# Altium PCB AudioLab.PcbDoc
Units mm, origin at the board's own origin, x right, y up, seen from the top; angles counter-clockwise.
Board outline 70 x 133.34 mm, 2 copper layers (Top Layer, Bottom Layer); 125 components, 71 nets, 537 pads, 7 vias.
Unrouted connection lines stored in the file: 231.
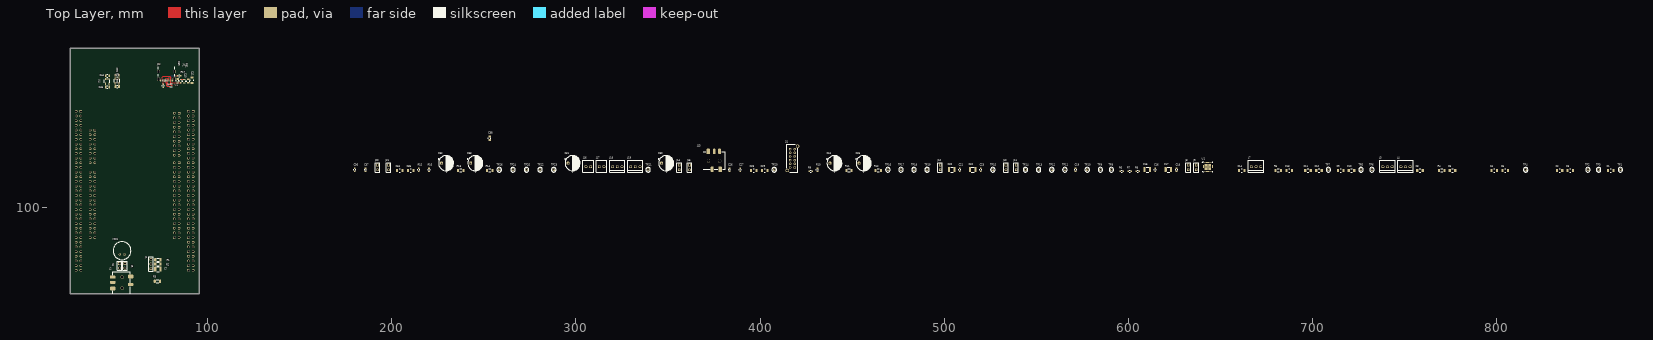
[diagram p0: Top Layer view]
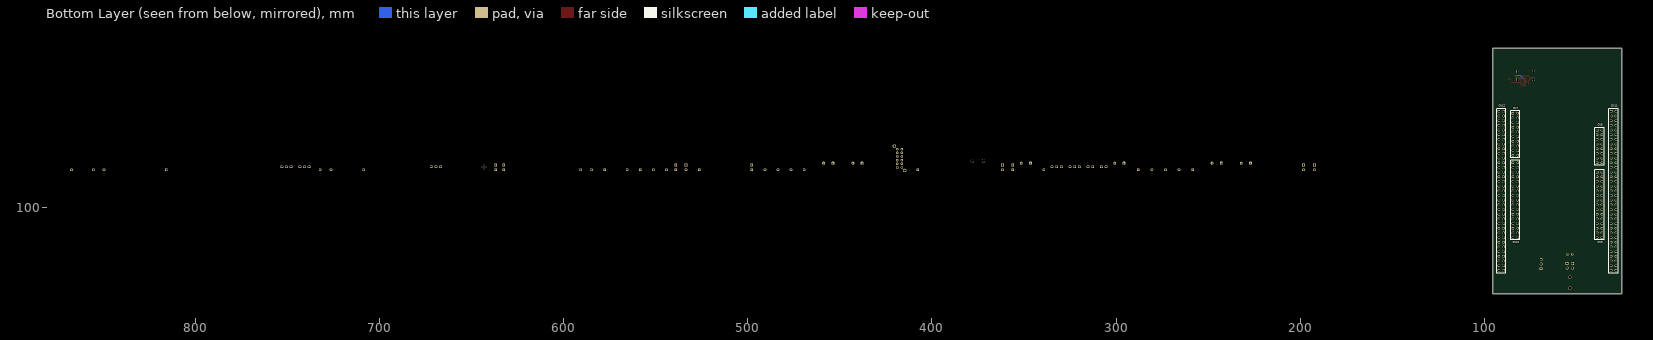
[diagram p1: Bottom Layer view, seen from below]

## Layer stack, top to bottom
Top Solder: solder mask 0.0102, Solder Resist, Dk 3.5
Top Layer: signal copper 0.0356
Dielectric 1: dielectric 0.32, FR-4, Dk 4.8
Bottom Layer: signal copper 0.0356
Bottom Solder: solder mask 0.0102, Solder Resist, Dk 3.5

## Board outline
25.3,53.45 95.3,53.45 95.3,186.79 25.3,186.79

## Design rules (kind name [scope] priority, off if disabled: settings)
AssemblyTestPointUsage [All] p1: isadvanced=TRUE
AssemblyTestpoint [All] p1: isadvanced=TRUE testpointundercomponent=TRUE minsize=1.016 maxsize=2.54 preferedsize=1.524 minholesize=0 maxholesize=1.016 preferedholesize=0.813 testpointgrid=0.025 usegrid=TRUE gridtolerance=0 allowsidetop=TRUE allowsidebottom=TRUE
Clearance [All] p1: isadvanced=TRUE gap=0.15 ignorepadtopadclearanceinfootprint=FALSE
Clearance [All] p2: gap=0.254 ignorepadtopadclearanceinfootprint=FALSE ismatrix=TRUE
ComponentClearance [All] p1: isadvanced=TRUE gap=0.254 collisioncheckmode=3 verticalgap=0.254 showdistances=FALSE
FabricationTestPointUsage [All] p1: isadvanced=TRUE valid=0 allowmultiple=FALSE
FabricationTestpoint [All] p1: isadvanced=TRUE side=3 testpointundercomponent=TRUE minsize=1.016 maxsize=2.54 preferedsize=1.524 minholesize=0 maxholesize=1.016 preferedholesize=0.813 testpointgrid=0.025 allowsidetop=TRUE allowsidebottom=TRUE usegrid=TRUE gridtolerance=0
FanoutControl Fanout_BGA [IsBGA] p1: isadvanced=TRUE bgadir=Out bgaviamode=Centered fanoutstyle=Auto fanoutdirection=Alternating viagrid=0.025 // Fanout_BGA (Default Rule)
FanoutControl Fanout_LCC [IsLCC] p2: isadvanced=TRUE bgadir=Out bgaviamode=Centered fanoutstyle=Auto fanoutdirection=Alternating viagrid=0.025 // Fanout_LCC (Default Rule)
FanoutControl Fanout_SOIC [IsSOIC] p3: isadvanced=TRUE bgadir=Out bgaviamode=Centered fanoutstyle=Auto fanoutdirection=Alternating viagrid=0.025 // Fanout_SOIC (Default Rule)
FanoutControl Fanout_Small [(CompPinCount < 5)] p4: isadvanced=TRUE bgadir=Out bgaviamode=Centered fanoutstyle=Auto fanoutdirection=OutThenIn viagrid=0.025 // Fanout_Small (Default Rule)
FanoutControl Fanout_Default [All] p5: isadvanced=TRUE bgadir=Out bgaviamode=Centered fanoutstyle=Auto fanoutdirection=Alternating viagrid=0.025 // Fanout_Default (Default Rule)
Height [All] p1: isadvanced=TRUE minheight=0 maxheight=25.4 prefheight=12.7
HoleSize [All] p1: isadvanced=TRUE absolutevalues=TRUE maxlimit=2.54 minlimit=0.025 maxpercent=80.000 minpercent=20.000
HoleToHoleClearance [All] p1: isadvanced=TRUE gap=0.254 allowstackedmicrovias=TRUE
LayerPairs [All] p1: isadvanced=TRUE enforce=TRUE
MinimumSolderMaskSliver [All] p1: isadvanced=TRUE minsoldermaskwidth=0.254
NetAntennae [All] p1: isadvanced=TRUE netantennaetolerance=0
PasteMaskExpansion [All] p1: isadvanced=TRUE expansion=0
PlaneClearance [All] p1: isadvanced=TRUE clearance=0.508
PlaneConnect [All] p1: isadvanced=TRUE planeconnectstyle=Relief reliefexpansion=0.508 reliefentries=4 reliefconductorwidth=0.254 reliefairgap=0.254
PolygonConnect [All] p1: connectstyle=Relief reliefconductorwidth=0.254 reliefentries=4 polygonreliefangle="90 Angle" airgapwidth=0.254
RoutingCorners [All] p1: isadvanced=TRUE cornerstyle=45-Degree minsetback=2.54 maxsetback=2.54
RoutingPriority [All] p1: isadvanced=TRUE routingpriority=0
RoutingVias [All] p1: holewidth=0.711 width=1.27 viastyle="Through Hole" minholewidth=0.711 minwidth=1.27 maxholewidth=0.711 maxwidth=1.27
ShortCircuit [All] p1: isadvanced=TRUE allowed=FALSE
SilkToSilkClearance [All] p1: isadvanced=TRUE silktosilkclearance=0.254
SilkToSolderMaskClearance [IsPad] p1: isadvanced=TRUE minsilkscreentomaskgap=0.254 clearancetoexposedcopper=TRUE
SolderMaskExpansion SolderMaskViasTented [IsVia] p1: isadvanced=TRUE expansion=0 istentingtop=TRUE useseparateexpansions=TRUE expansionbottom=0 istentingbottom=TRUE
SolderMaskExpansion SolderMaskPadsExpansion [IsPad] p2: isadvanced=TRUE expansion=0 istentingtop=FALSE
SolderMaskExpansion [All] p3: isadvanced=TRUE expansion=0 istentingtop=FALSE
SupplyNets "Schematic Supply Nets_9" [InNet('3V3')] p1: isadvanced=TRUE voltage=0.000
SupplyNets "Schematic Supply Nets_8" [InNet('DGND')] p2: isadvanced=TRUE voltage=0.000
SupplyNets "Schematic Supply Nets_7" [InNet('5V')] p3: isadvanced=TRUE voltage=0.000
SupplyNets "Schematic Supply Nets_6" [InNet('DRVDD')] p4: isadvanced=TRUE voltage=0.000
SupplyNets "Schematic Supply Nets_5" [InNet('DVDD')] p5: isadvanced=TRUE voltage=0.000
SupplyNets "Schematic Supply Nets_4" [InNet('VBUS')] p6: isadvanced=TRUE voltage=0.000
SupplyNets "Schematic Supply Nets_3" [InNet('IOVDD')] p7: isadvanced=TRUE voltage=0.000
SupplyNets "Schematic Supply Nets_2" [InNet('1V8')] p8: isadvanced=TRUE voltage=0.000
SupplyNets "Schematic Supply Nets_1" [InNet('GND')] p9: isadvanced=TRUE voltage=0.000
SupplyNets "Schematic Supply Nets" [InNet('AVDD')] p10: isadvanced=TRUE voltage=0.000
UnRoutedNet [All] p1: isadvanced=TRUE
UnpouredPolygon [All] p1: isadvanced=TRUE
Width [All] p1: isadvanced=TRUE maxlimit=1 minlimit=0.15 preferedwidth=0.254 minimp=50.000000 maximp=50.000000 favimp=50.000000
Width [All] p2: maxlimit=0.254 minlimit=0.254 preferedwidth=0.254
4 further rules are at their usual default settings.

## Classes and differential pairs
component class PS: C38 C39 C40 C41 C42 C43 C44 C45 F1 FB1 J22 R17 R18 t U2 U3 U4
component class CODEC: C1 C2 C3 C4 C5 C6 C7 C8 C9 C10 C11 C12 C13 C14 C15 C16 C17 C18 C19 C20 C21 C22 C23 C24 C25 C26 C27 C28 C29 C30 C31 C32 C33 C34 C35 C36 C37 J1 J2 J3 J4 J5 J6 J7 J8 J9 J10 J11 J12 J13 J14 J15 J16 J17 J18 J19 J20 J21 MIC1 R1 R2 R3 R4 R5 R6 R7 R8 R9 R10 R11 R12 R13 R14 R15 R16 S1 TP1 TP2 TP3 TP4 TP5 TP6 TP7 TP8 TP9 TP10 TP11 TP12 TP13 TP14 TP15 TP16 TP17 TP18 TP19 TP20 TP21 TP22 TP23 TP24 TP25 TP26 U1
component class AudioLab: CN7 CN8 CN9 CN10 CN11 CN12

## Components (designator, comment, footprint, x,y, rotation, side; value= is the part's Value field where it differs from the comment)
C1 "DNP_1206" CAPC3216 862.076,120.396 r0 top value=DNP
C2 "C3216X7R2A104K160AA" CAPC3216 834.263,120.396 r0 top value=0.1µF
C3 "C3216X7R2A104K160AA" CAPC3216 840.105,120.396 r0 top value=0.1µF
C4 "DNP_1206" CAPC3216 798.83,120.396 r0 top value=DNP
C5 "DNP_1206" CAPC3216 804.799,120.396 r0 top value=DNP
C6 "C3216X7R2A104K160AA" CAPC3216 776.097,120.396 r0 top value=0.1µF
C7 "C3225X7R1H106K250AC" CAPC3225 72.95,66.8 r180 top value=10µF
C8 "DNP_1206" CAPC3216 758.444,120.396 r0 top value=DNP
C9 "C3216X7R2A104K160AA" CAPC3216 715.391,120.396 r0 top value=0.1µF
C10 "C3216X7R2A104K160AA" CAPC3216 721.233,120.396 r0 top value=0.1µF
C11 "DNP_1206" CAPC3216 697.611,120.396 r0 top value=DNP
C12 "DNP_1206" CAPC3216 703.58,120.396 r0 top value=DNP
C13 "C3216X7R2A104K160AA" CAPC3216 687.451,120.396 r0 top value=0.1µF
C14 "DNP_1206" CAPC3216 661.543,120.396 r0 top value=DNP
C15 "C3225X7R1H106K250AC" CAPC3225 610.362,120.904 r0 top value=10µF
C16 "C0603G104K5RACT500" CAPC1608 614.68,120.777 r90 top value=0.1µF
C17 "C3225X7R1H106K250AC" CAPC3225 621.792,120.904 r0 top value=10µF
C18 "C0603G104K5RACT500" CAPC1608 626.237,120.777 r90 top value=0.1µF
C19 "C0603G104K5RACT500" CAPC1608 571.373,120.777 r90 top value=0.1µF
C20 "C3225X7R1H106K250AC" CAPC3225 504.19,120.904 r0 top value=10µF
C21 "C0603G104K5RACT500" CAPC1608 508.508,120.777 r90 top value=0.1µF
C22 "C3225X7R1H106K250AC" CAPC3225 515.493,120.904 r0 top value=10µF
C23 "C0603G104K5RACT500" CAPC1608 519.811,120.777 r90 top value=0.1µF
C24 "EEU-FR1E221B" CAPPRD500W60D800H1150 440.436,124.333 r0 top value=220µF
C25 "EEU-FR1E221B" CAPPRD500W60D800H1150 456.311,124.333 r0 top value=220µF
C26 "C1608X7R1H473K080AE" CAPC1608 383.413,120.777 r90 top value=47nF
C27 "C1608X7R1H473K080AE" CAPC1608 389.255,120.777 r90 top value=47nF
C28 "DNP_1206" CAPC3216 396.621,120.396 r0 top value=DNP
C29 "DNP_1206" CAPC3216 402.59,120.396 r0 top value=DNP
C30 "EEU-FR1E221B" CAPPRD500W60D800H1150 348.996,124.333 r0 top value=220µF
C31 "EEU-FR1E221B" CAPPRD500W60D800H1150 298.196,124.333 r0 top value=220µF
C32 "EEU-FR1E221B" CAPPRD500W60D800H1150 229.489,124.333 r0 top value=220µF
C33 "EEU-FR1E221B" CAPPRD500W60D800H1150 245.364,124.333 r0 top value=220µF
C34 "DNP_1206" CAPC3216 204.343,120.396 r0 top value=DNP
C35 "DNP_1206" CAPC3216 210.312,120.396 r0 top value=DNP
C36 "C1608X7R1H473K080AE" CAPC1608 179.832,120.777 r90 top value=47nF
C37 "C1608X7R1H473K080AE" CAPC1608 185.674,120.777 r90 top value=47nF
C38 "CC0805KRX7R9BB104" CAPC2012 253.111,137.922 r90 top value=100nF
C39 "CC0805KRX7R9BB104" CAPC2012 83.642,169.095 r270 top value=100nF
C40 "CL21B105KBFNNNE" CAPC2012 89.375,168.945 r90 top value=1µF
C41 "C3216X5R1C106K160AA" CAPC3216 91.5,169.47 r90 top value=10µF
C42 "CL21B105KBFNNNE" CAPC2012 50.93,172.105 r180 top value=1µF
C43 "CL21B105KBFNNNE" CAPC2012 50.935,165.95 r180 top value=1µF
C44 "CL21B105KBFNNNE" CAPC2012 45.517,171.875 r180 top value=1µF
C45 "CL21B105KBFNNNE" CAPC2012 45.517,165.72 r180 top value=1µF
CN7 "TSW-110-07-G-D" SAMTEC_TSW-110-07-G-D 83.136,140.064 r270 bottom locked
CN8 "TSW-108-07-G-D" SAMTEC_TSW-108-07-G-D 37.416,133.46 r270 bottom locked
CN9 "TSW-115-07-G-D" SAMTEC_TSW-115-07-G-D 37.416,101.71 r270 bottom locked
CN10 "TSW-117-07-G-D-LL" SAMTEC_TSW-117-07-G-D-LL 83.136,104.25 r270 bottom locked
CN11 "SSW-135-01-F-D" SAMTEC_SSW-135-01-F-D 29.903,109.33 r270 bottom locked
CN12 "SSW-135-01-F-D" SAMTEC_SSW-135-01-F-D 90.863,109.33 r270 bottom locked
F1 "0467002.NR" FUSC1608X31N 85.342,168.97 r270 top
FB1 "BLM21PG221SN1D" FP-BLM21-0_2-t0_85-e0_5-MFG 87.243,168.895 r270 top
J1 "M20-9990346" HARWIN_M20-9990346 69.1,69.575 r90 top
J2 "SJ1-3515-SMT-TR" SAMESKY_SJ1-3515-SMT 53.475,59.5 r90 top
J3 "397730003" MOLEX_0397730003 738.251,122.428 r0 top
J4 "397730003" MOLEX_0397730003 748.03,122.428 r0 top
J5 "HTSW-102-07-G-S" SAMTEC_HTSW-102-XX-X-S 51.975,68.6 r90 top
J6 "HTSW-102-07-G-S" SAMTEC_HTSW-102-XX-X-S 54.975,68.6 r90 top
J7 "397730003" MOLEX_0397730003 666.877,122.428 r0 top
J8 "HTSW-102-07-G-S" SAMTEC_HTSW-102-XX-X-S 632.587,122.047 r90 top
J9 "HTSW-102-07-G-S" SAMTEC_HTSW-102-XX-X-S 636.905,122.047 r90 top
J10 "HTSW-102-07-G-S" SAMTEC_HTSW-102-XX-X-S 533.527,122.047 r90 top
J11 "HTSW-102-07-G-S" SAMTEC_HTSW-102-XX-X-S 539.115,122.047 r90 top
J12 "HTSW-102-07-G-S" SAMTEC_HTSW-102-XX-X-S 497.84,122.047 r90 top
J13 "SJ1-3515-SMT-TR" SAMESKY_SJ1-3515-SMT 375.031,125.603 r0 top
J14 "HTSW-102-07-G-S" SAMTEC_HTSW-102-XX-X-S 356.108,122.047 r90 top
J15 "HTSW-102-07-G-S" SAMTEC_HTSW-102-XX-X-S 361.696,122.047 r90 top
J16 "0397730002" MOLEX_0397730002 305.435,122.428 r0 top
J17 "0397730002" MOLEX_0397730002 312.674,122.428 r0 top
J18 "397730003" MOLEX_0397730003 319.913,122.428 r0 top
J19 "397730003" MOLEX_0397730003 329.692,122.428 r0 top
J20 "HTSW-102-07-G-S" SAMTEC_HTSW-102-XX-X-S 192.278,122.047 r90 top
J21 "HTSW-102-07-G-S" SAMTEC_HTSW-102-XX-X-S 198.12,122.047 r90 top
J22 "USB4105-GF-A-120" GCT_USB4105-GF-A-120 77.575,174.1 r180 top
MIC1 "AOM-4544P-2-R" MIC_PUIAUDIO_AOM-4544P-2-R 53.475,76.8 r180 top
R1 "ERJ-8GEYJ222V" RESC3216 72.95,71.875 r0 top value=2.2kΩ
R2 "ERJ-8GEYJ222V" RESC3216 72.95,69.575 r0 top value=2.2kΩ
R3 "DNP_1206" RESC3216 72.7,60.2 r0 top value=DNP
R4 "ERJ-8GEY0R00V" RESC3216 770.255,120.396 r0 top value=0Ω
R5 "ERJ-8GEY0R00V" RESC3216 681.482,120.396 r0 top value=0Ω
R6 "ERJ-3GEYJ272V" RESC1608 596.519,120.015 r0 top value=2.7kΩ
R7 "ERJ-3GEYJ272V" RESC1608 600.837,120.015 r0 top value=2.7kΩ
R8 "RC0603FR-07100KL" RESC1608 605.155,120.015 r0 top value=100kΩ
R9 "RC0603FR-07100RL" RESC1608 427.609,120.015 r0 top value=100Ω
R10 "RC0603FR-07100RL" RESC1608 431.165,120.777 r90 top value=100Ω
R11 "ERJ-8GEY0R00V" RESC3216 448.31,120.396 r0 top value=0Ω
R12 "ERJ-8GEY0R00V" RESC3216 464.185,120.396 r0 top value=0Ω
R13 "ERJ-8GEY0R00V" RESC3216 237.363,120.396 r0 top value=0Ω
R14 "ERJ-8GEY0R00V" RESC3216 253.238,120.396 r0 top value=0Ω
R15 "RC0603FR-07100RL" RESC1608 214.63,120.777 r90 top value=100Ω
R16 "RC0603FR-07100RL" RESC1608 220.218,120.777 r90 top value=100Ω
R17 "RC0603FR-075K1L" RESC1608 84.467,171.8 r180 top value=5.1kΩ
R18 "RC0603FR-075K1L" RESC1608 75.825,166.35 r90 top value=5.1kΩ
S1 "EG4208" SW_EG4208 417.576,127 r90 top
TP1 "5000" KEYSTONE_5000 867.283,120.777 r0 top
TP2 "5000" KEYSTONE_5000 849.63,120.777 r0 top
TP3 "5000" KEYSTONE_5000 855.472,120.777 r0 top
TP4 "5000" KEYSTONE_5000 815.848,120.777 r0 top
TP5 "5000" KEYSTONE_5000 726.44,120.777 r0 top
TP6 "5000" KEYSTONE_5000 732.282,120.777 r0 top
TP7 "5000" KEYSTONE_5000 708.66,120.777 r0 top
TP8 "5000" KEYSTONE_5000 590.804,120.777 r0 top
TP9 "5000" KEYSTONE_5000 584.835,120.777 r0 top
TP10 "5000" KEYSTONE_5000 577.723,120.777 r90 top
TP11 "5000" KEYSTONE_5000 565.531,120.777 r0 top
TP12 "5000" KEYSTONE_5000 558.419,120.777 r90 top
TP13 "5000" KEYSTONE_5000 551.307,120.777 r90 top
TP14 "5000" KEYSTONE_5000 544.195,120.777 r90 top
TP15 "5000" KEYSTONE_5000 526.415,120.777 r90 top
TP16 "5000" KEYSTONE_5000 469.392,120.777 r90 top
TP17 "5000" KEYSTONE_5000 476.504,120.777 r90 top
TP18 "5000" KEYSTONE_5000 483.616,120.777 r90 top
TP19 "5000" KEYSTONE_5000 490.728,120.777 r90 top
TP20 "5000" KEYSTONE_5000 407.67,120.777 r90 top
TP21 "5000" KEYSTONE_5000 339.217,120.777 r0 top
TP22 "5000" KEYSTONE_5000 280.543,120.777 r90 top
TP23 "5000" KEYSTONE_5000 287.909,120.777 r90 top
TP24 "5000" KEYSTONE_5000 265.811,120.777 r90 top
TP25 "5000" KEYSTONE_5000 273.177,120.777 r90 top
TP26 "5000" KEYSTONE_5000 258.318,120.777 r90 top
U1 "TLV320AIC3104IRHBR" QFN50P500X500X100_HS-33N 643.255,122.301 r0 top
U2 "USBLC6-2P6" SOT50P160X60-6N 79.968,166.67 r0 top
U3 "TLV75533PDBVR" SOT95P280X110-5N 50.725,169.025 r270 top
U4 "TLV70018DDCR" SOT95P280X110-5N 45.312,168.795 r270 top

## Footprints (in the part's own frame and the unit in brackets; to place one, negate y for a bottom-side part, rotate by r counter-clockwise, add the part's x,y. Pads: shape width x height; smd on the part's side, far side on the other; paste and mask are expansions set on the pad)
CAPC1608 [mm] "SMD 0603 (1608 Metric)"
  rrect50% 0.8x0.95 smd: 1(-0.825,0) 2(0.825,0)
  silkscreen extent -0.24,-0.52 0.24,0.52, body extent -0.8,-0.4 0.8,0.4, height 0.95
CAPC2012 [mm] "SMD 0805 (2012 Metric)"
  rrect25% 1x1.45 smd: 1(-0.95,0) 2(0.95,0)
  silkscreen extent -0.26,-0.73 0.26,0.73, body extent -1,-0.63 1,0.63, height 1.35
CAPC3216 [mm] "SMD 1206 (3216 Metric)"
  rrect50% 1.15x1.8 smd: 1(-1.475,0) 2(1.475,0)
  silkscreen extent -0.29,-0.9 0.29,0.9, body extent -1.6,-0.8 1.6,0.8, height 1.8
CAPC3225 [mm] "SMD 1210 (3225 Metric)"
  rrect50% 1.15x2.7 smd: 1(-1.475,0) 2(1.475,0)
  silkscreen extent -0.71,-1.36 0.71,1.36, body extent -1.6,-1.25 1.6,1.25, height 1.25
CAPPRD500W60D800H1150 [mm]
  round 1.6 hole 0.8: N(2.5,0)
  rrect50% 1.6x1.6 hole 0.8: P(-2.5,0)
  silkscreen extent -4.41,-5.09 4.12,4.12, body extent -4,-4 4,4, height 11.5
FP-BLM21-0_2-t0_85-e0_5-MFG [mm]
  rect 0.6x1.25 smd: 1(-0.9,0) 2(0.9,0)
  silkscreen extent -0.23,-0.72 0.23,0.72, body extent -1.3,-0.82 1.3,0.82, height 0.25
FUSC1608X31N [mm]
  rrect50% 0.8x0.95 smd: 1(-0.825,0) 2(0.825,0)
  silkscreen extent -0.24,-0.52 0.24,0.52, body extent -0.8,-0.41 0.8,0.41, height 0.3
GCT_USB4105-GF-A-120 [mm]
  rect 0.6x1.15 smd: A1_B12(-3.2,4.755) A4_B9(-2.4,4.755) B1_A12(3.2,4.755) B4_A9(2.4,4.755)
  rect 0.3x1.15 smd: A5(-1.25,4.755) A6(-0.25,4.755) A7(0.25,4.755) A8(1.25,4.755) B5(1.75,4.755) B6(0.75,4.755) B7(-0.75,4.755) B8(-1.75,4.755)
  oval 1x2.1 hole 0.6 slot 1.7 at 90 deg: SH(-4.32,4.18) SH(4.32,4.18)
  rrect50% 1x1.8 hole 0.6 slot 1.4 at 90 deg: SH(-4.32,0) SH(4.32,0)
  round 0.65 hole 0.65 unplated: ""(-2.89,3.68) ""(2.89,3.68)
  silkscreen extent -4.47,-2.6 4.47,2.65, body extent -4.47,-2.6 4.47,5.11, height 3.31
HARWIN_M20-9990346 [mm]
  rect 1.53x1.53 hole 1.02: 01(-2.54,0)
  round 1.53 hole 1.02: 02(0,0) 03(2.54,0)
  silkscreen extent -3.81,-1.27 3.81,1.27, body extent -3.81,-1.27 3.81,1.27, height 8.74
KEYSTONE_5000 [mm]
  round 1.53 hole 1.02: TP(0,0)
  silkscreen extent -1.27,-1.27 1.27,1.27, body extent -1.27,-1.27 1.27,1.27, height 4.57
MIC_PUIAUDIO_AOM-4544P-2-R [mm]
  round 1.228 hole 0.72: N(-1.25,2) P(1.25,2)
  silkscreen extent -4.85,-4.85 4.85,4.85, body extent -4.85,-4.85 4.85,4.85, height 5.21
MOLEX_0397730002 [mil]
  round 63 hole 43: 1(0,0) 2(100,0)
  silkscreen extent -64,-123 164,143, body extent -59,-118 159,138, height 394
MOLEX_0397730003 [mil]
  round 63 hole 43: 1(0,0) 2(100,0) 3(200,0)
  silkscreen extent -64,-123 264,143, body extent -59,-118 259,138, height 394
QFN50P500X500X100_HS-33N [mm] "QFN, 32-Leads, Body 5.00x5.00mm, Pitch 0.50mm, Thermal Pad 3.45x3.45mm, IPC Medium Density"
  oval 0.6x0.25 smd: 1(-2.4,1.75) 2(-2.4,1.25) 3(-2.4,0.75) 4(-2.4,0.25) 5(-2.4,-0.25) 6(-2.4,-0.75) 7(-2.4,-1.25) 8(-2.4,-1.75) 17(2.4,-1.75) 18(2.4,-1.25) 19(2.4,-0.75) 20(2.4,-0.25) 21(2.4,0.25) 22(2.4,0.75) 23(2.4,1.25) 24(2.4,1.75)
  oval 0.25x0.6 smd: 9(-1.75,-2.4) 10(-1.25,-2.4) 11(-0.75,-2.4) 12(-0.25,-2.4) 13(0.25,-2.4) 14(0.75,-2.4) 15(1.25,-2.4) 16(1.75,-2.4) 25(1.75,2.4) 26(1.25,2.4) 27(0.75,2.4) 28(0.25,2.4) 29(-0.25,2.4) 30(-0.75,2.4) 31(-1.25,2.4) 32(-1.75,2.4)
  rect 3.45x3.45 smd: 33(0,0)
  silkscreen extent -3.47,-2.7 2.7,2.7, body extent -2.55,-2.55 2.55,2.55, height 1
RESC1608 [mm] "SMD 0603 (1608 Metric)"
  rrect50% 0.8x0.95 smd: 1(-0.825,0) 2(0.825,0)
  silkscreen extent -0.24,-0.52 0.24,0.52, body extent -0.8,-0.4 0.8,0.4, height 0.55
RESC3216 [mm] "SMD 1206 (3216 Metric)"
  rrect50% 1.125x1.75 smd: 1(-1.462,0) 2(1.462,0)
  silkscreen extent -0.58,-0.83 0.58,0.83, body extent -1.6,-0.8 1.6,0.8, height 0.7
SAMESKY_SJ1-3515-SMT [mm]
  rrect50% 2x3 smd: 1(-3.2,5.1) 2(3.3,-4.6)
  rrect50% 1.5x3 smd: 3(3,5.1) 10(-1.1,-4.6) 11(0.1,5.1)
  round 1.8 hole 1.8 unplated: ""(-3,0) ""(3,0)
  silkscreen extent -6,-4.5 6,5, body extent -9,-6 6,6, height 5.04
SAMTEC_HTSW-102-XX-X-S [mm]
  rect 1.53x1.53 hole 1.02: 01(1.27,0)
  round 1.53 hole 1.02: 02(-1.27,0)
  silkscreen extent -2.54,-1.24 2.54,1.24, body extent -2.54,-1.24 2.54,1.24, height 8.38
SAMTEC_SSW-135-01-F-D [mm]
  rect 1.37x1.37 hole 1.02: 01(-43.18,-1.163)
  round 1.39 hole 1.04: 02(-43.18,1.377) 03(-40.64,-1.163) 04(-40.64,1.377) 05(-38.1,-1.163) 06(-38.1,1.377) 07(-35.56,-1.163) 08(-35.56,1.377) 09(-33.02,-1.163) 10(-33.02,1.377) 11(-30.48,-1.163) 12(-30.48,1.377) 13(-27.94,-1.163) 14(-27.94,1.377) 15(-25.4,-1.163) 16(-25.4,1.377) 17(-22.86,-1.163) 18(-22.86,1.377) 19(-20.32,-1.163) 20(-20.32,1.377) 21(-17.78,-1.163) 22(-17.78,1.377) 23(-15.24,-1.163) 24(-15.24,1.377) 25(-12.7,-1.163) 26(-12.7,1.377) 27(-10.16,-1.163) 28(-10.16,1.377) 29(-7.62,-1.163) 30(-7.62,1.377) 31(-5.08,-1.163) 32(-5.08,1.377) 33(-2.54,-1.163) 34(-2.54,1.377) 35(0,-1.163) 36(0,1.377) 37(2.54,-1.163) 38(2.54,1.377) 39(5.08,-1.163) 40(5.08,1.377) 41(7.62,-1.163) 42(7.62,1.377) 43(10.16,-1.163) 44(10.16,1.377) 45(12.7,-1.163) 46(12.7,1.377) 47(15.24,-1.163) 48(15.24,1.377) 49(17.78,-1.163) 50(17.78,1.377) 51(20.32,-1.163) 52(20.32,1.377) 53(22.86,-1.163) 54(22.86,1.377) 55(25.4,-1.163) 56(25.4,1.377) 57(27.94,-1.163) 58(27.94,1.377) 59(30.48,-1.163) 60(30.48,1.377) 61(33.02,-1.163) 62(33.02,1.377) 63(35.56,-1.163) 64(35.56,1.377) 65(38.1,-1.163) 66(38.1,1.377) 67(40.64,-1.163) 68(40.64,1.377) 69(43.18,-1.163) 70(43.18,1.377)
  silkscreen extent -44.71,-2.37 44.71,2.58, body extent -44.7,-2.48 44.7,2.48, height 8.51
SAMTEC_TSW-108-07-G-D [mm]
  rect 1.37x1.37 hole 1.02: 01(-8.89,-1.27)
  round 1.37 hole 1.02: 02(-8.89,1.27) 03(-6.35,-1.27) 04(-6.35,1.27) 05(-3.81,-1.27) 06(-3.81,1.27) 07(-1.27,-1.27) 08(-1.27,1.27) 09(1.27,-1.27) 10(1.27,1.27) 11(3.81,-1.27) 12(3.81,1.27) 13(6.35,-1.27) 14(6.35,1.27) 15(8.89,-1.27) 16(8.89,1.27)
  silkscreen extent -10.16,-2.54 10.16,2.54, body extent -10.16,-2.54 10.16,2.54, height 8.38
SAMTEC_TSW-110-07-G-D [mm]
  rect 1.37x1.37 hole 1.02: 01(-11.43,-1.27)
  round 1.37 hole 1.02: 02(-11.43,1.27) 03(-8.89,-1.27) 04(-8.89,1.27) 05(-6.35,-1.27) 06(-6.35,1.27) 07(-3.81,-1.27) 08(-3.81,1.27) 09(-1.27,-1.27) 10(-1.27,1.27) 11(1.27,-1.27) 12(1.27,1.27) 13(3.81,-1.27) 14(3.81,1.27) 15(6.35,-1.27) 16(6.35,1.27) 17(8.89,-1.27) 18(8.89,1.27) 19(11.43,-1.27) 20(11.43,1.27)
  silkscreen extent -12.7,-2.54 12.7,2.54, body extent -12.7,-2.54 12.7,2.54, height 8.38
SAMTEC_TSW-115-07-G-D [mm]
  rect 1.37x1.37 hole 1.02: 01(-17.78,-1.27)
  round 1.37 hole 1.02: 02(-17.78,1.27) 03(-15.24,-1.27) 04(-15.24,1.27) 05(-12.7,-1.27) 06(-12.7,1.27) 07(-10.16,-1.27) 08(-10.16,1.27) 09(-7.62,-1.27) 10(-7.62,1.27) 11(-5.08,-1.27) 12(-5.08,1.27) 13(-2.54,-1.27) 14(-2.54,1.27) 15(0,-1.27) 16(0,1.27) 17(2.54,-1.27) 18(2.54,1.27) 19(5.08,-1.27) 20(5.08,1.27) 21(7.62,-1.27) 22(7.62,1.27) 23(10.16,-1.27) 24(10.16,1.27) 25(12.7,-1.27) 26(12.7,1.27) 27(15.24,-1.27) 28(15.24,1.27) 29(17.78,-1.27) 30(17.78,1.27)
  silkscreen extent -19.05,-2.54 19.05,2.54, body extent -19.05,-2.54 19.05,2.54, height 8.38
SAMTEC_TSW-117-07-G-D-LL [mm]
  rect 1.37x1.37 hole 1.02: 01(-20.32,-1.27)
  round 1.37 hole 1.02: 02(-20.32,1.27) 03(-17.78,-1.27) 04(-17.78,1.27) 05(-15.24,-1.27) 06(-15.24,1.27) 07(-12.7,-1.27) 08(-12.7,1.27) 09(-10.16,-1.27) 10(-10.16,1.27) 11(-7.62,-1.27) 12(-7.62,1.27) 13(-5.08,-1.27) 14(-5.08,1.27) 15(-2.54,-1.27) 16(-2.54,1.27) 17(0,-1.27) 18(0,1.27) 19(2.54,-1.27) 20(2.54,1.27) 21(5.08,-1.27) 22(5.08,1.27) 23(7.62,-1.27) 24(7.62,1.27) 25(10.16,-1.27) 26(10.16,1.27) 27(12.7,-1.27) 28(12.7,1.27) 29(15.24,-1.27) 30(15.24,1.27) 31(17.78,-1.27) 32(17.78,1.27) 33(20.32,-1.27) 34(20.32,1.27)
  silkscreen extent -21.59,-2.54 21.59,2.54, body extent -21.58,-2.55 21.6,2.53, height 8.38
SOT50P160X60-6N [mm]
  rrect8% 0.635x0.3 smd: 1(-0.69,0.5) 2(-0.69,0) 3(-0.69,-0.5) 4(0.69,-0.5) 5(0.69,0) 6(0.69,0.5)
  silkscreen extent -1.65,-0.85 0.65,0.85, body extent -0.8,-0.8 0.8,0.8, height 0.6
SOT95P280X110-5N [mm]
  rrect25% 1.25x0.59 smd: 1(-1.255,0.95) 2(-1.255,0) 3(-1.255,-0.95) 4(1.255,-0.95) 5(1.255,0.95)
  silkscreen extent -0.8,-1.57 0.8,1.57, body extent -1.4,-1.45 1.4,1.45, height 1.1
SW_EG4208 [mm]
  rect 1.308x1.308 / inner round 1.308 / far side rect 1.308x1.308 hole 0.8 mask+0.102: 1(-5,-1.25)
  round 1.308 hole 0.8 mask+0.102: 2(-3,-1.25) 3(-1,-1.25) 4(1,-1.25) 5(3,-1.25) 6(5,-1.25) 7(-5,1.25) 8(-3,1.25) 9(-1,1.25) 10(1,1.25) 11(3,1.25) 12(5,1.25)
  round 1.875 hole 1.25 mask+0.102: SH1(-6.6,2.8) SH2(6.6,-2.8)
  silkscreen extent -7.5,-3 7.5,3, body extent -7.5,-7 7.5,3, height 5.02

## Part data
C1 C4 C5 C8 C11 C12 C14 C28 C29 C34 C35 R3: "Do Not Populate 1206 (3216 Metric)"
C2 C3 C6 C9 C10 C13: "Multilayer Ceramic Capacitor, C Series, 0.1 - F, - 10%, X7R, 100 V, 1206 [3216 Metric]", Manufacturer=TDK, Package/Case="1206 (3216 Metric)", Supplier Part Number=445-1377-1-ND, Manufacturer Part Number=C3216X7R2A104K160AA, Supplier=DigiKey
C7 C15 C17 C20 C22: "Ceramic Capacitor, Multilayer, Ceramic, 50V, 10% +Tol, 10% -Tol, X7R, 15% TC, 10uF, Surface Mount, 1210", Manufacturer="TDK Corporation", Package/Case="1210 (3225 Metric)", Supplier Part Number=445-C3225X7R1H106K250ACCT-ND, Manufacturer Part Number=C3225X7R1H106K250AC, Supplier=DigiKey
C16 C18 C19 C21 C23: "0603 (1608METRIC) Ceramic Capacitor SMD Indust X7R HT175C 50V 0.1MUF ±10% X7R", Manufacturer=KEMET, Package/Case="0603 (1608 Metric)", Supplier Part Number=399-13261-1-ND, Manufacturer Part Number=C0603G104K5RACT500, Supplier=DigiKey
C24 C25 C30 C31 C32 C33: "Radial Can ALUMINUM ELECTROLYTIC CAPACITOR FR 25V 220muF ±20% 0.315Dia 8.00mm", Manufacturer="Panasonic Electronic Components", Package/Case="Radial, Can", Supplier Part Number=P124224CT-ND, Manufacturer Part Number=EEU-FR1E221B, Supplier=DigiKey
C26 C27 C36 C37: "50V 47nF X7R 卤10% 0603 Multilayer Ceramic Capacitors MLCC - SMD/SMT ROHS", Manufacturer=TDK, Package/Case="0603 (1608 Metric)", Supplier Part Number=445-173621-1-ND, Manufacturer Part Number=C1608X7R1H473K080AE, Supplier=DigiKey
C38 C39: "50V 100nF X7R ±10% 0805 Multilayer Ceramic Capacitors MLCC - SMD/SMT ROHS", Manufacturer=YAGEO, Package/Case="0805 (2012 Metric)", Supplier Part Number=311-1140-1-ND, Manufacturer Part Number=CC0805KRX7R9BB104, Supplier=DigiKey
C40 C42 C43 C44 C45: "50V 1uF X7R ±10% 0805 Multilayer Ceramic Capacitors MLCC - SMD/SMT ROHS", Manufacturer="Samsung Electro-Mechanics", Package/Case="0805 (2012 Metric)", Supplier Part Number=1276-1029-1-ND, Manufacturer Part Number=CL21B105KBFNNNE, Supplier=DigiKey
C41: "Multilayer Ceramic Capacitors MLCC – SMD/SMT; TDK; C3216X5R1C106K160AA; 10 µF; 1206; 16 V; 16 V", Manufacturer=TDK, Package/Case="1206 (3216 Metric)", Supplier Part Number=445-4052-1-ND, Manufacturer Part Number=C3216X5R1C106K160AA, Supplier=DigiKey
CN7: "Pin Header, Vertical, Board-to-Board, 2.54 mm, 2 Rows, 20 Contacts, Through Hole, HTSW Series"
CN8: "Pin Header, Unshrouded, Board-to-Board, 2.54 mm, 2 Rows, 16 Contacts, Through Hole, TSW"
CN9: "Conn, Header, 30Pos, 2Row, 2.54Mm Rohs Compliant: Yes"
CN10: "Pin Header, Board-to-Board, 2.54 mm, 2 Rows, 34 Contacts, Through Hole, TSW Series"
CN11 CN12: "PCB Receptacle, Board-to-Board, 2.54 mm, 2 Rows, 70 Contacts, Solder, SSW Series, Phosphor Bronze"
F1: "Electric Fuse, Very Fast Blow, 2A, 32VAC, 32VDC, 35A (IR), Surface Mount, 0603", Manufacturer="Littelfuse Inc", Package/Case="0603 (1608 Metric)", Supplier Part Number=F1397CT-ND, Manufacturer Part Number=0467002.NR, Supplier=DigiKey
FB1: "220 Ohms @ 100 MHz 1 Power Line Ferrite Bead 0805 (2012 Metric) 2A 45mOhm"
J1: "M20 ROHS3Compliant COMMERCIAL UL Connector Header, Cuttable 50Cycles 30mOhm -40C~105C 3A"
J2 J13: "3.5 mm, Stereo, Right Angle, Surface Mount (SMT), Audio Jack Connector"
J3 J4 J7 J18 J19: "2.54mm Pitch Beau Eurostyle Fixed Mount PCB Terminal Block, Green, 3 Circuits", Manufacturer=Molex, Manufacturer Part Number=0397730003, Package/Case=Bulk, Supplier Part Number=0397730003-ND, Supplier=DigiKey
J5 J6 J8 J9 J10 J11 J12 J14 J15 J20 J21: "Pin Header, Vertical, Board-to-Board, 2.54 mm, 1 Rows, 2 Contacts, Through Hole, HTSW"
J16 J17: "2.54mm Pitch Beau Eurostyle Fixed Mount PCB Terminal Block, Green, 2 Circuits", Manufacturer=Molex, Package/Case=Bulk, Supplier Part Number=0397730002-ND, Manufacturer Part Number=0397730002, Supplier=DigiKey
J22: "USB Connector, 24 Contact(s), Female, Right Angle, Solder Terminal, Locking, Receptacle"
MIC1: "50 Hz ~ 16 kHz Analog Microphone Electret Condenser 1.5 V ~ 10 V Omnidirectional (-44dB ±2dB) PC Pins"
R1 R2: "Res Thick Film 1206 2.2K Ohm 5% 1/4W ±200ppm/°C Molded SMD Punched Carrier T/R", Manufacturer="Panasonic Industry", Package/Case="1206 (3216 Metric)", Supplier Part Number=P2.2KECT-ND, Manufacturer Part Number=ERJ-8GEYJ222V, Supplier=DigiKey
R4 R5 R11 R12 R13 R14: "ERJ Series 1206 0 Ohm 0.25 W Jumper Surface Mount Thick Film Chip Resistor", Manufacturer="Panasonic Industry", Package/Case="1206 (3216 Metric)", Supplier Part Number=P0.0ECT-ND, Manufacturer Part Number=ERJ-8GEY0R00V, Supplier=DigiKey
R6 R7: "Res Thick Film 0603 2.7K Ohm 5% 0.1W(1/10W) ±200ppm/C Pad SMD T/R Automotive AEC-Q200", Manufacturer="Panasonic Industry", Package/Case="0603 (1608 Metric)", Supplier Part Number=P2.7KGCT-ND, Manufacturer Part Number=ERJ-3GEYJ272V, Supplier=DigiKey
R8: "Res General Purpose Thick Film 0603 100k Ohm 1% 1/10W ±100ppm/°C Molded Paper T/R", Manufacturer="Yageo Group", Package/Case="0603 (1608 Metric)", Supplier Part Number=311-100KHRCT-ND, Manufacturer Part Number=RC0603FR-07100KL, Supplier=DigiKey
R9 R10 R15 R16: "Res Thick Film 0603 100 Ohm 1% 1/10W ±100ppm/°C Molded SMD Paper T/R", Manufacturer="Yageo Group", Package/Case="0603 (1608 Metric)", Supplier Part Number=311-100HRCT-ND, Manufacturer Part Number=RC0603FR-07100RL, Supplier=DigiKey
R17 R18: "Res Thick Film 0603 5.1K Ohm 1% 0.1W(1/10W) ±100ppm/C Pad SMD T/R", Manufacturer=YAGEO, Package/Case="0603 (1608 Metric)", Supplier Part Number=311-5.10KHRCT-ND, Manufacturer Part Number=RC0603FR-075K1L, Supplier=DigiKey
S1: "Slide Switch, EG Series, 4PDT, ON-ON, 4mm Actuator, 200mA DC, 30VDC, R/A PC", Package=None, Check_prices=https://www.snapeda.com/parts/EG4208/E-Switch/view-part/?ref=eda, MF=E-Switch, MP=EG4208, SnapEDA_Link=https://www.snapeda.com/parts/EG4208/E-Switch/view-part/?ref=snap
TP1 TP2 TP3 TP4 TP5 TP6 TP7 TP8 TP9 TP10 TP11 TP12 TP13 TP14 TP15 TP16 TP17 TP18 TP19 TP20 TP21 TP22 TP23 TP24 TP25 TP26: "Test Point Miniature THM H .300 Nylon 46 Insulated Red PhosBronze/Silver"
U1: "Low-Power Stereo CODEC with 6 Inputs, 6 Outputs, HP Amp and Enhanced Digital Effects", Manufacturer="Texas Instruments", Package/Case="32-VFQFN Exposed Pad", Supplier Part Number=296-26818-1-ND, Manufacturer Part Number=TLV320AIC3104IRHBR, Supplier=DigiKey
U2: "Tvs Diodes & Esd Suppressors; USBLC6-2P6; Stmicroelectronics; 5 V; 17 V; 6 V; 6 V"
U3: "500mA high-PSRR low-IQ low-dropout voltage regulator with enable 5-SOT-23 -40 to 125"
U4: "200-mA, high-PSRR, low-IQ, low-dropout voltage regulator with enable 5-SOT-23-THIN -40 to 125"

## Via types
v1: diameter 0.5, hole 0.2, Top Layer to Bottom Layer, tented both sides, 5 vias
v2: diameter 0.6, hole 0.3, Top Layer to Bottom Layer, tented top, 2 vias

## Nets (pads, with @x,y where several pads share a name; then routed paths per layer and width w, separated by ;. In a path a pad name is that pad's centre, name@x,y a point inside that pad or via, vN(x,y) a via of type N, cw(c..) or ccw(c..) an arc to the next point about the centre after c; other vN are vias at no path point)
1V8: C45.1 J11.02 U4.5
3V3: C43.1 J8.02 J9.02 J10.02 R3.2 U3.5
5V: C40.1 C41.1 C42.1 C44.1 CN11.05 FB1.2 U3.1 U3.3 U4.1 U4.3
AVDD: C15.2 C16.1 J8.01 U1.25
BCLK: CN7.16 TP13.TP U1.2
CODEC_HPLCOM: C32.P J12.02 J20.01 U1.20
CODEC_HPLOUT: C24.P C31.P J14.01 S1.4 TP21.TP U1.19
CODEC_HPRCOM: C33.P J12.01 J21.01 S1.7 TP26.TP U1.22
CODEC_HPROUT: C25.P C30.P J15.01 S1.1 TP20.TP U1.23
CODEC_IN1LM: C9.2 C11.2 TP5.TP U1.11
CODEC_IN1LP: C2.2 C4.2 TP2.TP U1.10
CODEC_IN1RM: C10.2 C12.2 TP6.TP U1.13
CODEC_IN1RP: C3.2 C5.2 TP3.TP U1.12
CODEC_IN2L: C6.2 C8.2 TP4.TP U1.14
CODEC_IN2R: C13.2 C14.2 TP7.TP U1.16
CODEC_LEFT_LOM: R15.1 U1.28
CODEC_LEFT_LOP: R9.1 U1.27
CODEC_RIGHT_LOM: R16.1 U1.30
CODEC_RIGHT_LOP: R10.1 U1.29
DGND: C19.1 C20.1 C21.2 C22.1 C23.2
DIN: CN7.14 TP11.TP U1.4
DM: CN12.13 U2.4
DOUT: CN7.20 TP12.TP U1.5
DP: CN12.11 U2.6
DRVDD: C17.2 C18.1 J9.01 U1.18 U1.24
DVDD: C22.2 C23.1 J11.01 U1.32
EXT_IN1LM: C9.1 J3.2
EXT_IN1LP: C2.1 J3.1
EXT_IN1RM: C10.1 J4.2
EXT_IN1RP: C3.1 J4.1
EXT_IN2L: C6.1 J7.1 R4.2
EXT_IN2R: C13.1 J7.2 R5.2
GND: C1.1 C4.1 C5.1 C7.1 C8.1 C11.1 C12.1 C14.1 C15.1 C16.2 C17.1 C18.2 C26.2 C27.2 C28.1 C29.1 C34.1 C35.1 C36.2 C37.2 C38.1 C39.1 C40.2 C41.2 C42.2 C43.2 C44.2 C45.2 CN7.07 CN8.12 CN8.14 CN9.11 CN9.24 CN10.06 CN10.18 CN10.21 CN10.28 CN11.07 CN11.19 CN11.20 CN11.21 CN11.50 CN11.59 CN12.10 CN12.19 CN12.40 CN12.53 CN12.64 J2.1 J3.3 J4.3 J7.3 J18.3 J19.3 J22.A1_B12 J22.B1_A12 MIC1.N R17.1 R18.1 S1.9 U1.6 U1.17 U1.21 U1.26 U1.33 U2.2 U3.2 U3.4 U4.2 U4.4
  other v1: 643.255,121.201 642.155,122.301 643.255,122.301 644.355,122.301 643.255,123.401
HPLCOM: J18.2 R13.2
HPLOUT: J18.1 R11.2
HPRCOM: J19.2 R14.2
HPROUT: J19.1 R12.2
I2C_SCL: CN7.01 R7.1 TP9.TP U1.8
I2C_SDA: CN7.03 R6.1 TP10.TP U1.9
IOVDD: C20.2 C21.1 J10.01 R6.2 R7.2 R8.2 U1.7
LEFT_LOM: C36.1 J16.1 R15.2 TP24.TP
LEFT_LOP: C26.1 J16.2 R9.2 TP16.TP
MCLK: CN7.12 TP15.TP U1.1
MICBIAS: C1.2 J1.03 TP1.TP U1.15
NetC7_2: C7.2 J1.01 R3.1
NetC24_N: C24.N C28.2 J14.02 R11.1 TP18.TP
NetC25_N: C25.N C29.2 J15.02 R12.1 TP19.TP
NetC30_N: C30.N S1.3
NetC31_N: C31.N S1.6
NetC32_N: C32.N C34.2 J20.02 R13.1 TP22.TP
NetC33_N: C33.N C35.2 J21.02 R14.1 TP23.TP
NetC38_2: C38.2 J22.SH
NetF1_1: F1.1 FB1.1 | length 1.9
  Top Layer w0.5: F1.1 FB1.1
NetJ1_02: J1.02 R1.1 R2.1
NetJ2_10: J2.10 J6.02
NetJ2_11: J2.11 J5.02
NetJ5_01: J5.01 J6.01 MIC1.P
NetJ13_1: J13.1 S1.8
NetJ13_2: J13.2 S1.2
NetJ13_3: J13.3 S1.5
NetJ22_A5: J22.A5 R17.2 | length 6.4
  Top Layer w0.254: J22.A5 78.825,170.381 v2(79.1,170.656) ; v2(82.6,171.8) R17.2
  Bottom Layer w0.254: v2(79.1,170.656) 80.244,171.8 v2(82.6,171.8)
NetJ22_B5: J22.B5 R18.2 | length 2.2
  Top Layer w0.254: R18.2 J22.B5
RESET_N: C19.2 CN10.14 R8.1 TP8.TP U1.31
RIGHT_LOM: C37.1 J17.1 R16.2 TP25.TP
RIGHT_LOP: C27.1 J17.2 R10.2 TP17.TP
SEL_IN2L: J2.2 R1.2 R4.1
SEL_IN2R: J2.3 R2.2 R5.1
USB_DM1: J22.A7 J22.B7 U2.1 | length 6.2
  Top Layer w0.254: J22.A7 77.325,170.407 77.443,170.525 78.175,170.525 78.325,170.375 J22.B7 78.325,167.425 78.58,167.17 U2.1
USB_DP1: J22.A6 J22.B6 U2.3 | length 6.7
  Top Layer w0.254: J22.B6 76.825,168.25 77.178,167.898 77.825,167.898 ; J22.A6 77.825,167.898 ; U2.3 78.105,166.17 77.825,166.45 77.825,167.898
VBUS: C39.2 F1.2 J22.A4_B9 J22.B4_A9 U2.5 | length 17.1
  Top Layer w0.3: J22.B4_A9 75.325,169.495 75.325,171.125 75.7,171.5 79.45,171.5 79.825,171.125 79.825,169.495 J22.A4_B9 ; 79.975,167.595 79.975,166.912 80.218,166.67 U2.5
  Top Layer w0.5: 79.975,167.595 79.975,168.145 ; J22.A4_B9 79.975,168.145 ; F1.2 C39.2 79.975,168.145
WCLK: CN7.10 TP14.TP U1.3
pads on no net: CN7.02 CN7.04 CN7.05 CN7.06 CN7.08 CN7.09 CN7.11 CN7.13 CN7.15 CN7.17 CN7.18 CN7.19 CN8.01 CN8.02 CN8.03 CN8.04 CN8.05 CN8.06 CN8.07 CN8.08 CN8.09 CN8.10 CN8.11 CN8.13 CN8.15 CN8.16 CN9.01 CN9.02 CN9.03 CN9.04 CN9.05 CN9.06 CN9.07 CN9.08 CN9.09 CN9.10 CN9.12 CN9.13 CN9.14 CN9.15 CN9.16 CN9.17 CN9.18 CN9.19 CN9.20 CN9.21 CN9.22 CN9.23 CN9.25 CN9.26 CN9.27 CN9.28 CN9.29 CN9.30 CN10.01 CN10.02 CN10.03 CN10.04 CN10.05 CN10.07 CN10.08 CN10.09 CN10.10 CN10.11 CN10.12 CN10.13 CN10.15 CN10.16 CN10.17 CN10.19 CN10.20 CN10.22 CN10.23 CN10.24 CN10.25 CN10.26 CN10.27 CN10.29 CN10.30 CN10.31 CN10.32 CN10.33 CN10.34 CN11.01 CN11.02 CN11.03 CN11.04 CN11.06 CN11.08 CN11.09 CN11.10 CN11.11 CN11.12 CN11.13 CN11.14 CN11.15 CN11.16 CN11.17 CN11.18 CN11.22 CN11.23 CN11.24 CN11.25 CN11.26 CN11.27 CN11.28 CN11.29 CN11.30 CN11.31 CN11.32 CN11.33 CN11.34 CN11.35 CN11.36 CN11.37 CN11.38 CN11.39 CN11.40 CN11.41 CN11.42 CN11.43 CN11.44 CN11.45 CN11.46 CN11.47 CN11.48 CN11.49 CN11.51 CN11.52 CN11.53 CN11.54 CN11.55 CN11.56 CN11.57 CN11.58 CN11.60 CN11.61 CN11.62 CN11.63 CN11.64 CN11.65 CN11.66 CN11.67 CN11.68 CN11.69 CN11.70 CN12.01 CN12.02 CN12.03 CN12.04 CN12.05 CN12.06 CN12.07 CN12.08 CN12.09 CN12.12 CN12.14 CN12.15 CN12.16 CN12.17 CN12.18 CN12.20 CN12.21 CN12.22 CN12.23 CN12.24 CN12.25 CN12.26 CN12.27 CN12.28 CN12.29 CN12.30 CN12.31 CN12.32 CN12.33 CN12.34 CN12.35 CN12.36 CN12.37 CN12.38 CN12.39 CN12.41 CN12.42 CN12.43 CN12.44 CN12.45 CN12.46 CN12.47 CN12.48 CN12.49 CN12.50 CN12.51 CN12.52 CN12.54 CN12.55 CN12.56 CN12.57 CN12.58 CN12.59 CN12.60 CN12.61 CN12.62 CN12.63 CN12.65 CN12.66 CN12.67 CN12.68 CN12.69 CN12.70 J2. J13. J13.10 J13.11 J22. J22.A8 J22.B8 S1.10 S1.11 S1.12 S1.SH1 S1.SH2

## Silkscreen, mask and mechanical layers (free items; w line width, h text height)
Board Shape:
  the board outline again, w0.254